# EAGLE board routev9.1 (EAGLE 8.6.0)
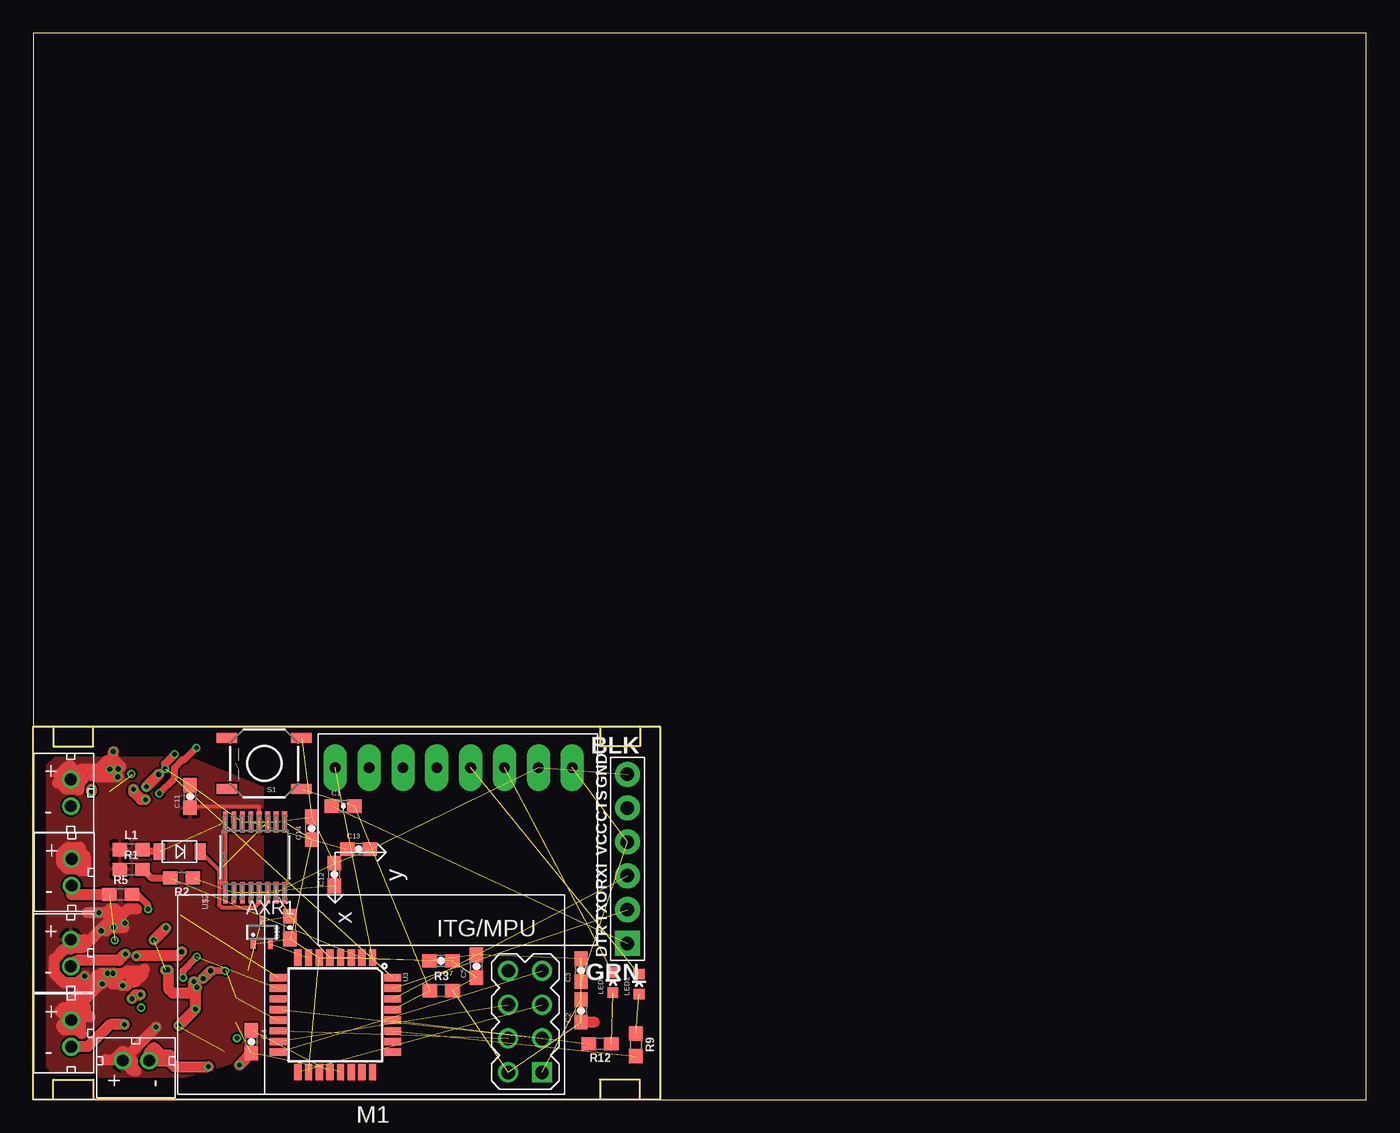
[diagram p0: board, top side]
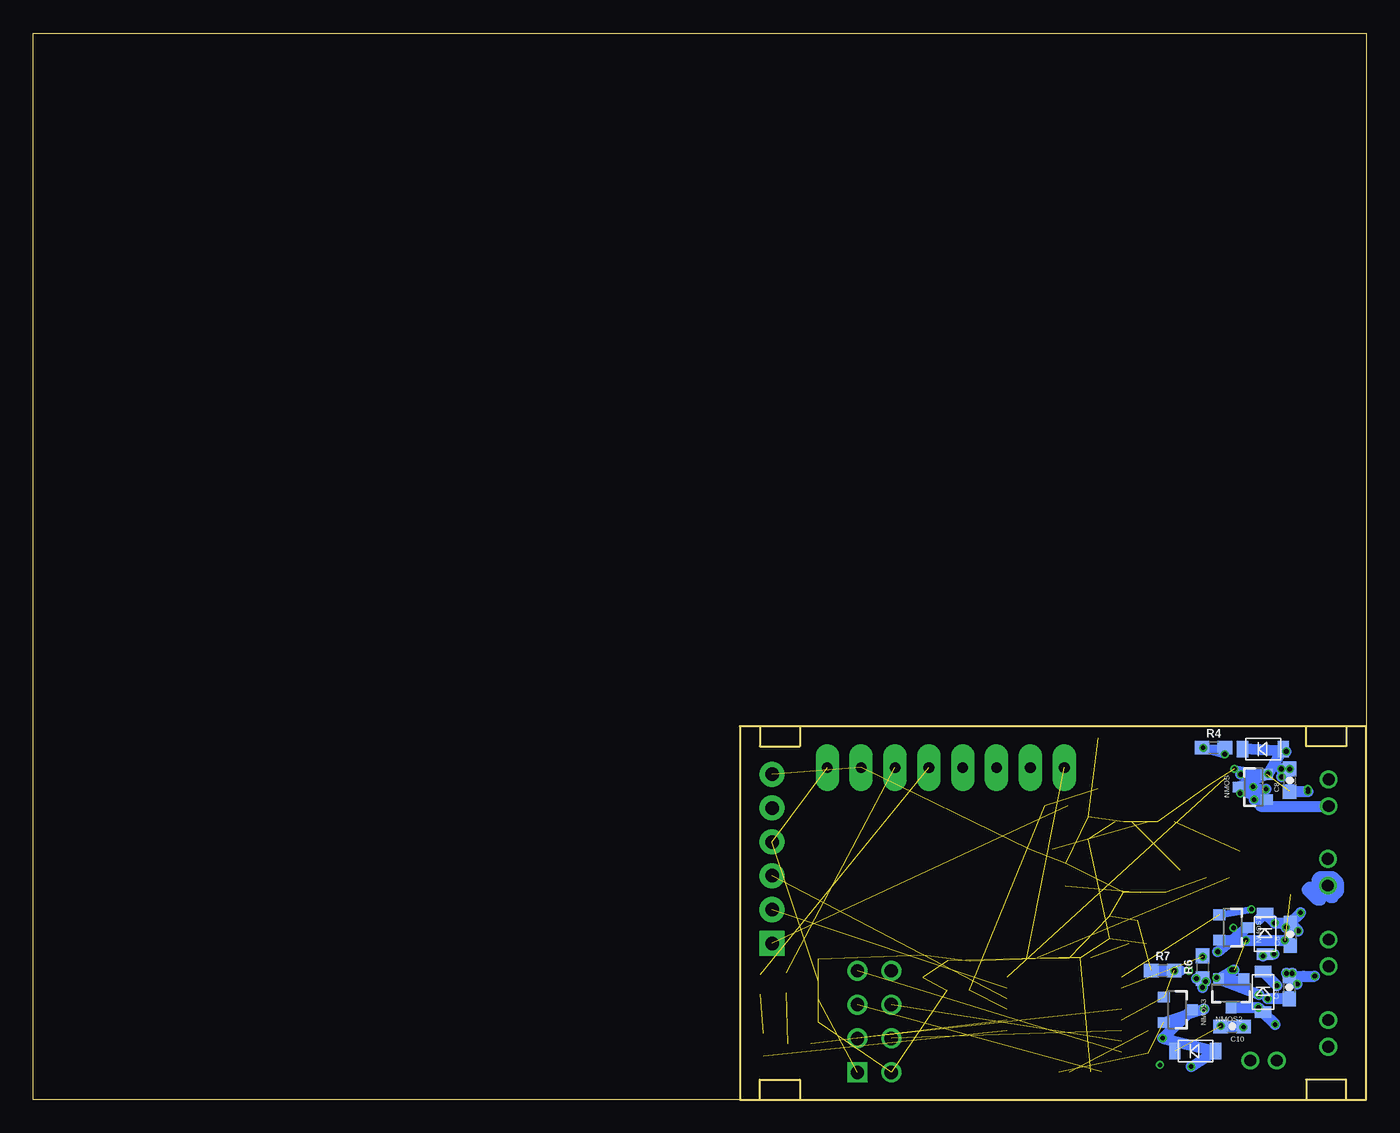
[diagram p1: board, bottom side, seen from below]

Size 100 x 80 mm. Coordinates in mm from the lower left corner, seen from the top.
Outline: 47,0 100,0 100,80 0,80 0,28
Outline: 0,28 1.5,28
Outline: 1.5,28 4.5,28
Outline: 4.5,28 42.5,28
Outline: 42.5,28 45.5,28
Outline: 45.5,28 47,28 47,0
Outline: 47,0 45.5,0
Outline: 45.5,0 42.5,0
Outline: 42.5,0 4.5,0
Outline: 4.5,0 1.5,0
Outline: 1.5,0 0,0 0,28
Outline: 42.5,28 42.5,26.5 45.5,26.5 45.5,28
Outline: 45.5,0 45.5,1.5 42.5,1.5 42.5,0
Outline: 1.5,0 1.5,1.5 4.5,1.5 4.5,0
Outline: 1.5,28 1.5,26.5 4.5,26.5 4.5,28
Copper layers (1*16): Top 0.035559375mm / dielectric 1.6mm / Bottom 0.035559375mm
Design rules "oshpark-2layer": minimum track width 6mil, minimum drill 10mil, track to track 6mil, track to pad 6mil, pad to pad 6mil, via to via 6mil, smd to smd 6mil, copper to edge 15mil, drill to drill 6mil, minimum pad ring 5mil, minimum via ring 5mil, stop-mask expansion 2.5mil, vias tented up to drill 0mil, thermal gap 10mil

## Footprints (pad centres in the part's own frame; a part is rotated, then mirrored left to right if it is on the bottom)
SC70-3L = smd 0.35 x 0.8: 1 -0.65,-0.85; 2 0.65,-0.85; 3 0,0.85
0603-CAP = smd 1.1 x 1: 1 -0.85,0; 2 0.85,0
MINI2-F3-B = smd 1.22 x 0.85: NEG 0,1.55; POS 0,-1.5
FTDI_DEVICE_SIDE = drill 1.016 pad 1.88 square: P$1 -6.35,0 | drill 1.016 pad 1.88: P$2 -3.81,0; P$3 -1.27,0; P$4 1.27,0; P$5 3.81,0; P$6 6.35,0
0603 = smd 1.1 x 1: 1 -0.85,0; 2 0.85,0
LED-0603 = smd 0.8 x 0.8: A 0,-0.75; C 0,0.75
WIRELESS-NRF24L01 = drill 1 square: 1 -12.7,6.35 | drill 1: 2 -10.16,6.35; 3 -12.7,3.81; 4 -10.16,3.81; 5 -12.7,1.27; 6 -10.16,1.27; 7 -12.7,-1.27; 8 -10.16,-1.27
JST_CONNECTOR_FEMALE = drill 0.889: + 0,1; - 0,-1
SOT23-3 = smd 0.8 x 0.9: 1 -0.95,-1; 2 0.95,-1; 3 0,1.1
TACTILE-SWITCH-SMD = smd 1.524 x 0.762: 1 -2.794,1.905; 2 2.794,1.905; 3 -2.794,-1.905; 4 2.794,-1.905
GY-521 = drill 0.8 pad 1.778 long: ADO -8.89,-6.35; GND -8.89,6.35; INT -8.89,-8.89; SCL -8.89,3.81; SDA -8.89,1.27; VCC -8.89,8.89; XCL -8.89,-3.81; XDA -8.89,-1.27
TQFP32-08 = smd 1.27 x 0.559: 1 -4.293,2.8; 2 -4.293,2; 3 -4.293,1.2; 4 -4.293,0.4; 5 -4.293,-0.4; 6 -4.293,-1.2; 7 -4.293,-2; 8 -4.293,-2.8; 17 4.293,-2.8; 18 4.293,-2; 19 4.293,-1.2; 20 4.293,-0.4; 21 4.293,0.4; 22 4.293,1.2; 23 4.293,2; 24 4.293,2.8 | smd 0.559 x 1.27: 9 -2.8,-4.293; 10 -2,-4.293; 11 -1.2,-4.293; 12 -0.4,-4.293; 13 0.4,-4.293; 14 1.2,-4.293; 15 2,-4.293; 16 2.8,-4.293; 25 2.8,4.293; 26 2,4.293; 27 1.2,4.293; 28 0.4,4.293; 29 -0.4,4.293; 30 -1.2,4.293; 31 -2,4.293; 32 -2.8,4.293
21-0055H_16 = smd 1.6 x 0.356: 1 -2.654,2.223; 2 -2.654,1.587; 3 -2.654,0.953; 4 -2.654,0.318; 5 -2.654,-0.318; 6 -2.654,-0.953; 7 -2.654,-1.587; 8 -2.654,-2.223; 9 2.654,-2.223; 10 2.654,-1.587; 11 2.654,-0.953; 12 2.654,-0.318; 13 2.654,0.318; 14 2.654,0.953; 15 2.654,1.587; 16 2.654,2.223

## Placement (x,y rotation side)
AXR1  MAX7375  [SC70-3L]  17.14,12.55 0 top
C1  100nF  [0603-CAP]  23.25,22.02 0 top
C2  10uF  [0603-CAP]  41.1,6.65 90 top
C3  100nF  [0603-CAP]  41.1,9.7 90 top
C4  100nF  [0603-CAP]  16.36,4.34 270 top
C5  100nF  [0603-CAP]  33.25,10.01 90 top
C6  100uF  [0603-CAP]  5.69,12.4 90 bottom
C7  100nF  [0603-CAP]  30.59,10.41 180 top
C8  100uF  [0603-CAP]  5.74,23.95 90 bottom
C9  100uF  [0603-CAP]  5.77,8.41 90 bottom
C10  100uF  [0603-CAP]  10.06,5.49 180 bottom
C11  100uF  [0603-CAP]  11.76,22.75 90 top
C12  100uF  [0603-CAP]  22.58,16.88 90 top
C13  0.1uF  [0603-CAP]  24.41,18.79 0 top
C14  4.7uF  [0603-CAP]  20.88,20.36 90 top
C15  100nF  [0603-CAP]  19.25,12.9 90 top
DIODE  DB2W40300L  [MINI2-F3-B]  7.72,26.29 90 bottom
DIODE1  DB2W40300L  [MINI2-F3-B]  7.59,12.42 0 bottom
DIODE2  DB2W40300L  [MINI2-F3-B]  7.75,8.05 0 bottom
DIODE3  DB2W40300L  [MINI2-F3-B]  12.8,3.63 90 bottom
DIODE4  DB2W40300L  [MINI2-F3-B]  10.97,18.61 270 top
J2  FTDI_DEVICE  [FTDI_DEVICE_SIDE]  44.58,18.06 90 top
L1  10uH  [0603]  7.34,18.76 0 top
LED2  [LED-0603]  45.44,8.66 0 top
LED3  [LED-0603]  43.48,8.76 0 top
M1  WIRELESS-NRF24L01  [WIRELESS-NRF24L01]  25.47,8.39 180 top
MOTOR  JST_CONNECTOR_FEMALE  [JST_CONNECTOR_FEMALE]  2.82,23.01 0 top
MOTOR1  JST_CONNECTOR_FEMALE  [JST_CONNECTOR_FEMALE]  2.82,11 0 top
MOTOR2  JST_CONNECTOR_FEMALE  [JST_CONNECTOR_FEMALE]  2.84,4.97 0 top
MOTOR3  JST_CONNECTOR_FEMALE  [JST_CONNECTOR_FEMALE]  7.7,2.92 90 top
NMOS  N-CHANNEL-MOSFET-IRLML6244TRPBF  [SOT23-3]  8.46,23.44 90 bottom
NMOS1  N-CHANNEL-MOSFET-IRLML6244TRPBF  [SOT23-3]  10.03,12.9 270 bottom
NMOS2  N-CHANNEL-MOSFET-IRLML6244TRPBF  [SOT23-3]  10.13,8 180 bottom
NMOS3  N-CHANNEL-MOSFET-IRLML6244TRPBF  [SOT23-3]  14.17,6.73 270 bottom
R1  2.2k  [0603]  7.34,17.27 0 top
R2  2.2k  [0603]  11.13,16.64 180 top
R3  10k  [0603]  30.61,8.18 0 top
R4  10k  [0603]  11.46,26.39 0 bottom
R5  10k  [0603]  6.55,15.39 0 top
R6  10k  [0603]  12.27,9.93 90 bottom
R7  10k  [0603]  15.27,9.68 0 bottom
R9  1k  [0603]  45.21,4.11 270 top
R12  1k  [0603]  42.52,4.19 180 top
S1  SWITCH-MOMENTARY-2SMD  [TACTILE-SWITCH-SMD]  17.33,25.22 180 top
U2  GY-521MPU6050  [GY-521]  31.54,16.01 270 top
U3  ATMEGA328P_TQFP  [TQFP32-08]  22.66,6.36 270 top
U$1  JST_CONNECTOR_FEMALE  [JST_CONNECTOR_FEMALE]  2.87,17.05 0 top
U$2  MAX1672'MAX1672'  [21-0055H_16]  16.63,18.18 90 top

## Library data of the parts
AXR1 DIODE DIODE1-DIODE4 J2 M1 MOTOR MOTOR1-MOTOR3 U2 U$1 = quad
C1 C15 = SparkFun-Capacitors; PROD_ID: CAP-00810
C2-C14 = SparkFun-Passives
L1 = SparkFun-Coils; PROD_ID: NDUC-07874
LED2 LED3 = SparkFun
NMOS NMOS1-NMOS3 = quad; DATASHEET: http://www.mouser.com/ds/2/196/irlml6244pbf-936666.pdf; MOUSER: 942-IRLML6244TRPBF; URL: http://www.mouser.com/Search/ProductDetail.aspx?R=IRLML6244TRPBFvirtualkey57370000virtualkey942-IRLML6244TRPBF
R1-R7 R9 R12 = SparkFun-Resistors; PROD_ID: RES-08272
S1 = quad; PROD_ID: SWCH-08247
U3 = quad; PROD_ID: IC-09069
U$2 = voltreg

## Nets
BATTERY+: C6.2 C8.2 C9.2 C10.2 C11.1 DIODE1.NEG DIODE2.NEG DIODE3.NEG DIODE.NEG L1.1 MOTOR1.+ MOTOR2.+ MOTOR3.+ MOTOR.+ R1.1 U$1.+ U$2.12
FTDI-RX: J2.P$3 U3.30
FTDI-TX: J2.P$2 U3.31
GND: AXR1.3 C2.2 C3.2 C4.2 C5.2 C6.1 C7.2 C8.1 C9.1 C10.1 C11.2 C12.2 C13.2 C14.2 C15.2 J2.P$6 M1.1 NMOS1.2 NMOS2.2 NMOS3.2 NMOS.2 R2.1 R4.1 R5.1 R6.1 R7.1 S1.3 U2.GND U3.3 U3.5 U3.21 U$1.- U$2.2 U$2.6 U$2.7 U$2.10 U$2.14
IMU-INT: U2.INT U3.1
IMU-SCL: LED3.C U2.SCL
IMU-SDA: LED2.C U2.SDA
MEASURE_PIN: R1.2 R2.2 U3.2
MOTOR1: NMOS.1 R4.2 U3.32
MOTOR2: NMOS1.1 R5.2 U3.9
MOTOR3: NMOS2.1 R6.2 U3.10
MOTOR4: NMOS3.1 R7.2 U3.13
N$1: DIODE4.POS L1.2 U$2.1 U$2.16
N$2: C4.1 U3.20
N$3: LED2.A R9.1
N$4: DIODE1.POS MOTOR1.- NMOS1.3
N$5: DIODE2.POS MOTOR2.- NMOS2.3
N$6: DIODE.POS MOTOR.- NMOS.3
N$7: DIODE3.POS MOTOR3.- NMOS3.3
N$8: R9.2 U3.27
N$9: LED3.A R12.1
N$10: R12.2 U3.28
N$12: C1.1 J2.P$1
OSC1: AXR1.2 U3.7
RESET: C1.2 R3.1 S1.1 U3.29
RF-CE: M1.3 U3.12
RF-CSN: M1.4 U3.14
RF-MISO: M1.7 U3.16
RF-MOSI: M1.6 U3.15
RF-SCK: M1.5 U3.17
VCC: AXR1.1 C2.1 C3.1 C5.1 C7.1 C14.1 C15.1 J2.P$4 M1.2 R3.2 U2.VCC U3.4 U3.6 U3.18 U$2.9
VR-PS: C12.1 DIODE4.NEG U$2.5 U$2.11
VR-REF: C13.1 U$2.13

## Tracks (layer width: path | path; a pad name or v marks a point on that pad's centre or on a via)
BATTERY+  (via drill 0.35)  (1 unrouted)
  Top 0.305: U$2.12 16.95,21.93 16.97,21.95 11.81,21.95 C11.1
  Top 0.813: v5.1,12.65 4.96,12.65 4.3,12 3.83,12 | v5.98,9.47 6.82,9.47 6.95,9.6 8.14,9.6 8.23,9.68 | 4.71,9.26 2.87,7.42 2.87,6.93 2.84,6.91 MOTOR2.+ 2.67,5.97 2.01,6.63 2.26,6.88 3.25,6.88 | v5.73,24.79 3.6,24.79 MOTOR.+ 2.52,24.31 1.91,24.31 2.6,25 2.82,25 3.73,24.09 3.73,24.02 3.4,23.69 3.4,23.21 3.34,23.27 2.46,23.27 2.01,23.72 1.83,23.72 | MOTOR3.+ v9.21,5.43 | v6.37,24.8 6.56,24.99 6,25.55 v6,26.11 | MOTOR3.+ 6.62,3 | 6.62,3 6.04,3 | 5.41,3 6.04,3 | 6.04,3 6.66,3.61 6.75,3.61 7.44,2.92 7.44,2.82 | MOTOR3.+ 7.46,2.16 7.68,2.16 | 7.68,2.16 7.7,2.14 | 7.68,2.16 6.84,3 6.62,3 | 3.25,6.88 3.91,6.88 3.91,6.55 4.27,6.2 3.5,6.2 3.5,5.08 | 3.5,5.08 3.62,4.97 | 3.5,5.08 3.37,5.22 2.35,5.22 2.13,5.44 2.13,5.64 | 3.42,12 3.83,12 | MOTOR1.+ 2.82,11.36 | 2.82,11.36 2.74,11.28 | 2.82,11.36 2.86,11.4 | 2.86,11.4 3.24,11.4 | 3.24,11.4 3.83,12 | U$1.+ 2.87,17.64 2.54,17.31 2.13,17.71 2.13,18.47 2.59,18.92 3.5,18.92 3.5,18.67 3.89,18.29 3.89,17.17 3.53,17.17 3.39,17.31 2.82,17.31 | 6.39,24.21 v6.33,24.21 4.82,24.21 4.77,24.26 4.52,24.26 4.52,24.4 5.54,25.42 | 4.06,14.02 v4.91,14.02 5.49,14.02 5.79,14.33 6.12,14.33 6.66,13.79 6.07,13.79 | 5.89,14.1 5.89,13.97 6.07,13.79 | 8.23,9.68 8.23,9.41 7.65,8.83 7.3,8.83 7.03,8.56 v6.71,8.56 6.6,8.56 6.5,8.67 5.94,8.67 5.13,9.47 v5.55,9.47 | 8.23,9.68 8.35,9.8 | v5.17,8.67 5.03,8.67 3.25,6.88 | v3.86,9.26 3.34,8.74 2.3,8.74 1.56,9.48 1.56,10.52 2.44,11.4 2.86,11.4 | 3.24,11.4 3.68,11.4 6.07,13.79 | 5.7,12.92 v6.02,12.92 6.78,12.92 | 5.7,12.92 5.43,12.65 | 5.7,12.92 7.06,14.28 7.75,14.28
  Bottom 0.813: C6.2 v6.87,13.24 DIODE1.NEG 8.02,13.54 | C6.2 v5.1,12.65 | C9.2 v5.98,9.47 | C9.2 4.71,9.26 | v5.73,24.79 C8.2 | v6,26.11 DIODE.NEG | v9.21,5.43 C10.2 | C8.2 v6.37,24.8 | C8.2 v6.33,24.21 | C6.2 v4.91,14.02 | DIODE2.NEG v6.71,8.56 | C9.2 v5.17,8.67 | C9.2 v5.55,9.47 | C9.2 v3.86,9.26 | C6.2 v6.02,12.92
  pour Top: 1.63,25.7 11.79,25.7 17.25,23.44 17.25,3.35 11.51,1.68 1.75,1.68 1.02,2.41 1.02,25.1
FTDI-RX  (1 unrouted)
FTDI-TX  (1 unrouted)
GND  (via drill 0.35)  (28 unrouted)
  Top 0.508: v14.39,9.65 v13.31,9.65
  Top 0.61: v9.88,24.82 9.88,25.19 v10.61,25.91
  Top 0.813: v4.37,23.1 v4.37,23.29 | U$1.- 2.87,15.39 R5.1 | v7.39,7.56 7.7,7.87 v8.05,7.87 | v9.41,24.39 v8.48,23.47 | v9.91,9.73 v10.11,9.73 10.13,9.71 10.13,8.32 10.45,7.99 11.72,7.99 12.04,8.32 v12.04,8.86 | v9.03,11.95 v9.96,12.88 | v13.31,9.65 v12.74,9.08 | v12.27,8.42 12.16,8.31 v12.16,6.79 v10.91,5.53 | C4.2 15.47,2.6 v15.47,2.59
  Bottom 0.508: R7.1 v14.39,9.65
  Bottom 0.61: v9.88,24.82 NMOS.2 | R4.1 v10.61,25.91
  Bottom 0.813: C8.1 v4.37,23.1 | C9.1 v7.39,7.56 | v8.05,7.87 NMOS2.2 v9.91,9.73 | C6.1 v6.1,11.95 NMOS1.2 v9.03,11.95 | NMOS.2 v9.41,24.39 | R7.1 13.95,9.68 | v12.74,9.08 R6.1 | v12.27,8.42 R6.1 | NMOS3.2 v12.16,6.79 | v10.91,5.53 C10.1 | v12.04,8.86 R6.1 | U$1.- 3.43,15.49 3.43,14.96 3.66,14.96 4.45,15.75 4.27,15.93 3.79,15.93 3.66,16.05 3.66,16.56 3.48,16.74 2.52,16.74 2.11,16.33 2.11,15.54 2.49,15.16 2.67,15.16
IMU-INT  (1 unrouted)
IMU-SCL  (1 unrouted)
IMU-SDA  (1 unrouted)
MEASURE_PIN  (1 unrouted)
  Top 0.508: R1.2 8.83,16.64 R2.2
MOTOR1  (via drill 0.35)  (1 unrouted)
  Top 0.508: v9.46,22.97 10.6,24.11 10.6,24.89 11.19,25.48 11.32,25.48 v12.23,26.39
  Bottom 0.508: NMOS.1 v9.46,22.97 | v12.23,26.39 R4.2
MOTOR2  (via drill 0.35)  (1 unrouted)
  Top 0.508: v8.61,14.28 8.61,14.56 7.78,15.39 R5.2
  Bottom 0.508: NMOS1.1 v8.61,14.28
MOTOR3  (via drill 0.35)  (1 unrouted)
  Top 0.508: v11.23,9.15 11.23,9.67 v12.27,10.71
  Bottom 0.508: 11.2,9 NMOS2.1 v11.23,9.15 | v12.27,10.71 R6.2
MOTOR4  (2 unrouted)
N$1  (1 unrouted)
  Top 0.305: U$2.16 U$2.1
  Top 0.508: DIODE4.POS 8.34,18.61 L1.2
N$2  (1 unrouted)
N$3  (1 unrouted)
N$4  (via drill 0.35)
  Top 0.813: v11.13,11.08 10.82,10.77 v7.75,10.77 | v6.91,10.92 6.42,10.44 3.26,10.44 MOTOR1.-
  Bottom 0.813: NMOS1.3 v11.13,11.08 | v7.75,10.77 DIODE1.POS v6.91,10.92
N$5  (via drill 0.35)
  Top 0.813: v6.83,5.63 5.75,5.63 4.08,3.97 MOTOR2.-
  Bottom 0.813: NMOS2.3 v8.1,6.9 DIODE2.POS v6.83,5.63
N$6  (via drill 0.35)
  Top 0.813: v7.52,23.28 7.52,23.07 8.08,22.5 v8.41,22.5
  Bottom 0.813: DIODE.POS v7.36,24.43 NMOS.3 v7.52,23.28 | v8.41,22.5 7.92,22.01 MOTOR.-
N$7  (via drill 0.35)
  Top 0.813: v13.13,2.46 10.6,2.46 10.14,2.92 MOTOR3.- 8.7,3.56 9.05,3.91 9.6,3.35 10.27,3.35
  Bottom 0.813: v13.13,2.46 DIODE3.POS v15.27,4.6 NMOS3.3
N$8  (1 unrouted)
N$9  (1 unrouted)
N$10  (1 unrouted)
  Top 0.305: U3.28 26.96,5.94
N$12  (1 unrouted)
OSC1  (1 unrouted)
RESET  (3 unrouted)
RF-CE  (1 unrouted)
RF-CSN  (1 unrouted)
RF-MISO  (1 unrouted)
RF-MOSI  (1 unrouted)
RF-SCK  (1 unrouted)
VCC  (14 unrouted)
  Top 0.813: 42.07,5.82 42.06,5.8 C2.1
VR-PS  (2 unrouted)
  Top 0.305: DIODE4.NEG 13.93,17.2 13.93,14.6 14.11,14.42 16.62,14.42 16.95,14.75 U$2.5
VR-REF  (1 unrouted)